# Altium PCB E-ink_brd.PcbDoc
Units mm, origin at the board's own origin, x right, y up, seen from the top; angles counter-clockwise.
Board outline 49.53 x 34.21 mm, 2 copper layers (Top Layer, Bottom Layer), stack 0.579 mm thick; 68 components, 58 nets, 239 pads, 102 vias.
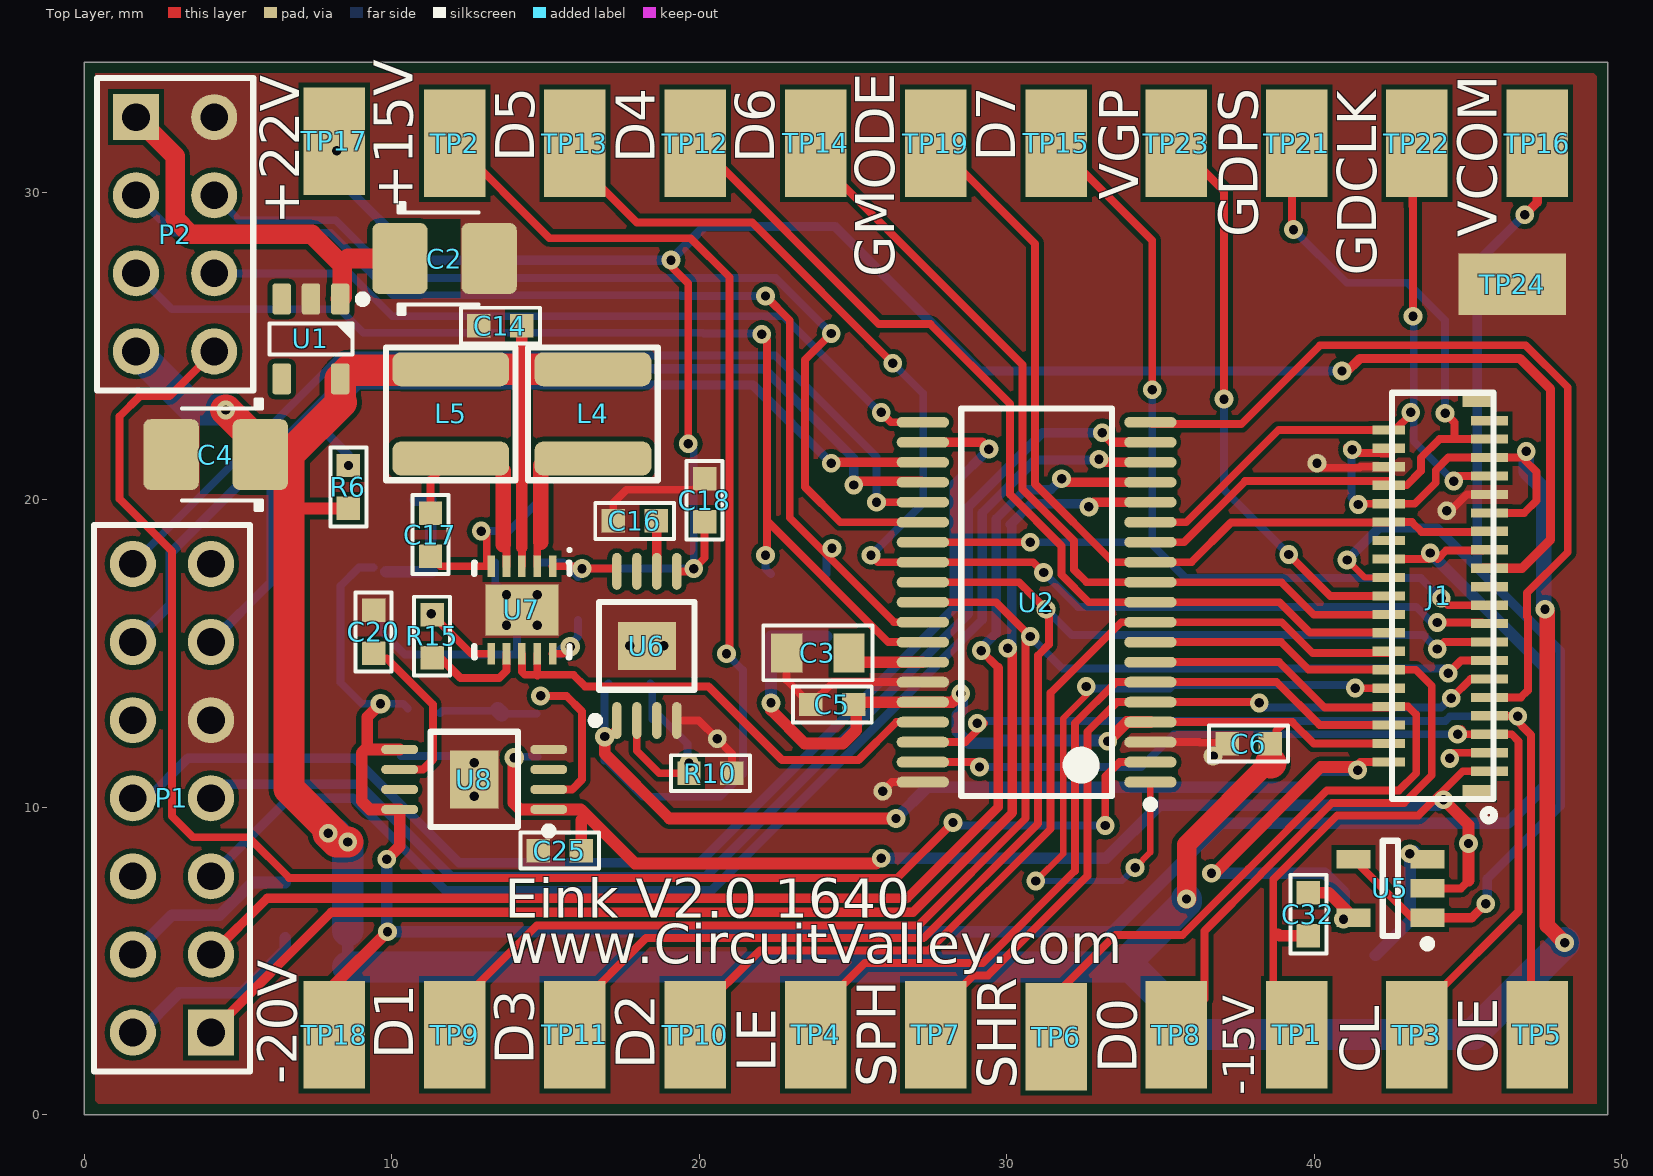
[diagram p0: Top Layer view]
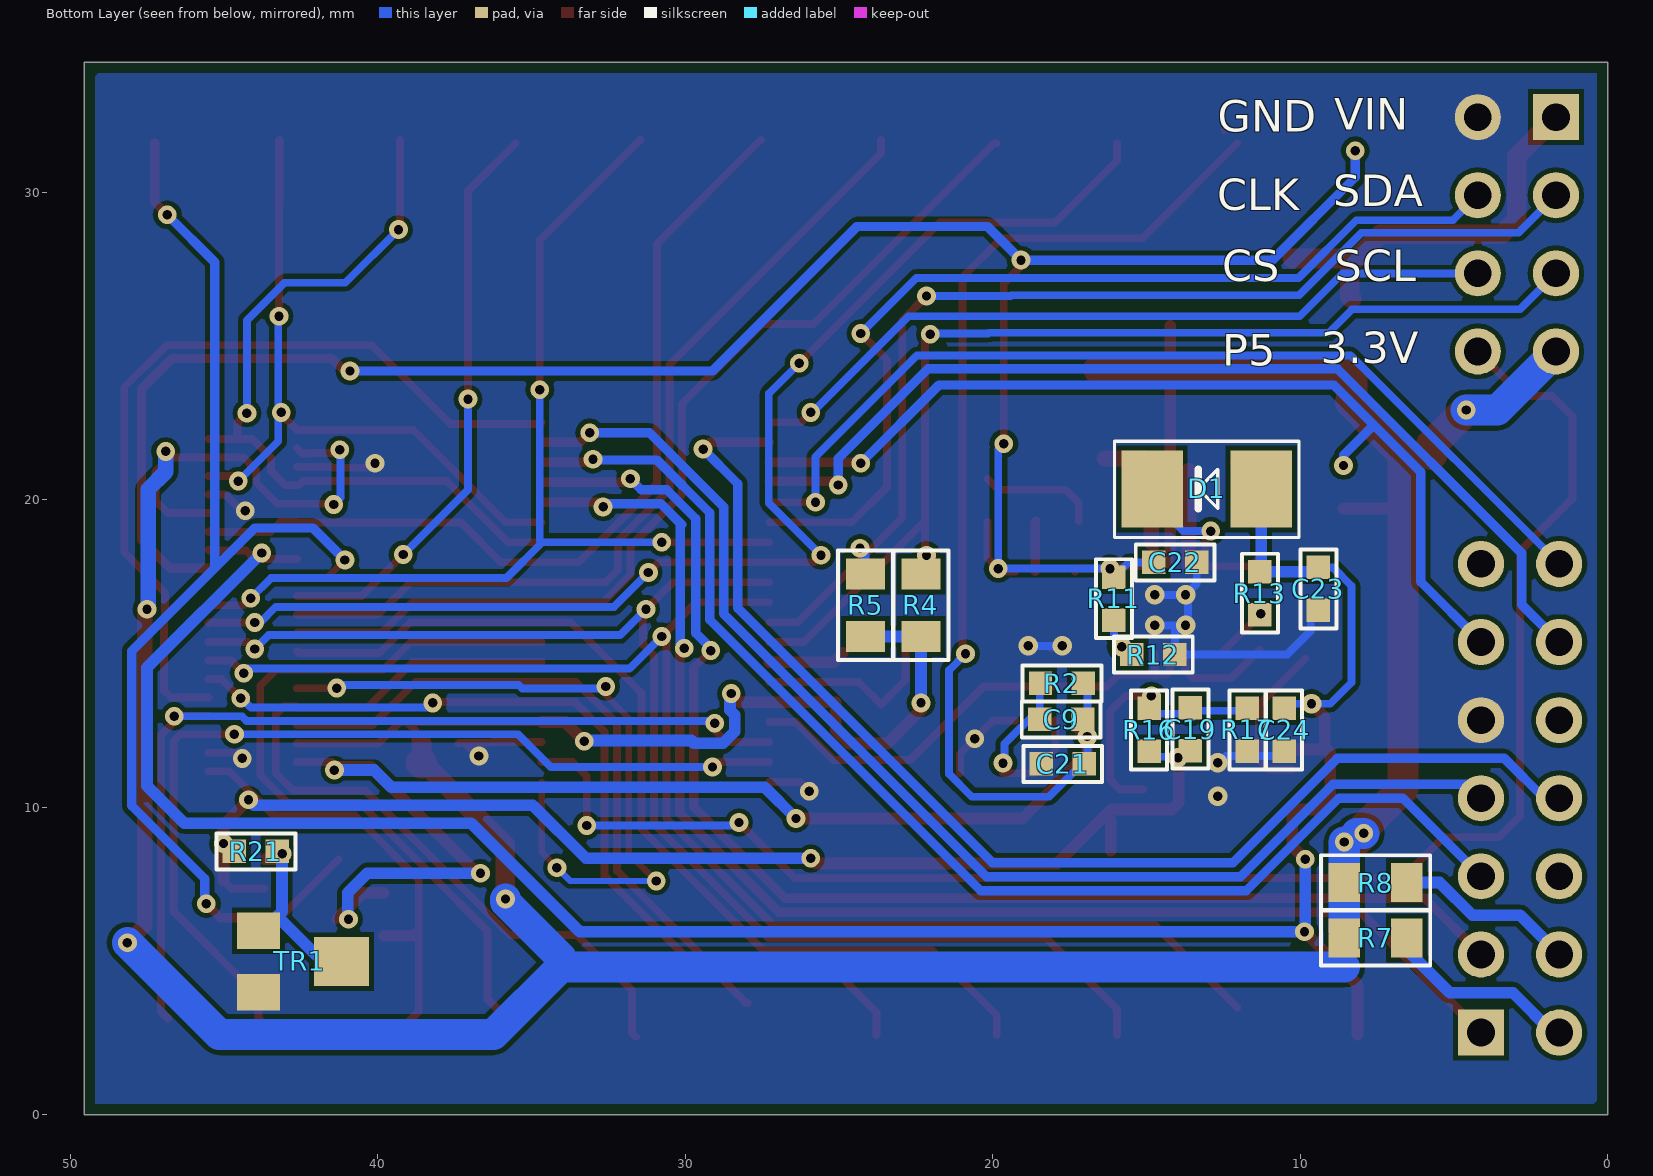
[diagram p1: Bottom Layer view, seen from below]

## Layer stack, top to bottom
Top Solder: solder mask 0.0102, Solder Resist, Dk 3.5
Top Layer: signal copper 0.0356
Dielectric1: core 0.508, FR-4, Dk 4.8
Bottom Layer: signal copper 0.0356
Bottom Solder: solder mask 0.0102, Solder Resist, Dk 3.5

## Board outline
0,0 0,34.214 49.53,34.214 49.53,0

## Design rules (kind name [scope] priority, off if disabled: settings)
Clearance [All] p1: gap=0.152
ComponentClearance [All] p1: gap=0 collisioncheckmode=3 verticalgap=0 showdistances=FALSE
HoleSize [All] p1: absolutevalues=TRUE maxlimit=12.7 minlimit=0.305 maxpercent=80.000 minpercent=20.000
MinimumAnnularRing [All] p1: minimumring=0.152
MinimumSolderMaskSliver [All] p1: minsoldermaskwidth=0
PlaneConnect [All] p1: planeconnectstyle=Relief reliefexpansion=0.203 reliefentries=4 reliefconductorwidth=0.203 reliefairgap=0
PolygonConnect [All] p1: connectstyle=Direct reliefconductorwidth=0 reliefentries=4 polygonreliefangle="90 Angle" airgapwidth=0
RoutingVias [All] p1: holewidth=0.457 width=0.61 viastyle="Through Hole" minholewidth=0.203 minwidth=0.33 maxholewidth=5.08 maxwidth=5.08
SilkToSilkClearance [All] p1: silktosilkclearance=0
SilkToSolderMaskClearance [IsPad] p1: minsilkscreentomaskgap=0 clearancetoexposedcopper=TRUE
SolderMaskExpansion [All] p1: expansion=0.091
Width [All] p1: maxlimit=12.7 minlimit=0.152 preferedwidth=0.254
24 further rules are at their usual default settings.

## Components (designator, comment, footprint, x,y, rotation, side; value= is the part's Value field where it differs from the comment)
C2 "10µ" CAPMP3528X210N 11.709,27.838 r0 top
C3 "2u2" 0805C-GENERIC 23.089,15.011 r0 top
C4 "10uf" CAPMP3528X210N 4.267,21.463 r180 top
C5 "100nF" 0603C-GENERIC 25.019,13.335 r180 top
C6 "100nF" 0603C-GENERIC 38.557,12.065 r180 top
C9 "10nf" 0603C-GENERIC 17.069,12.852 r0 bottom
C14 "10uF" 0603C-GENERIC 12.827,25.654 r0 top
C16 "1uF" 0603C-GENERIC 17.196,19.304 r0 top
C17 "1uF" 0603C-GENERIC 11.252,18.161 r90 top
C18 "22uF" 0603C-GENERIC 20.168,20.676 r270 top
C19 "10nf" 0603C-GENERIC 13.564,11.836 r90 bottom
C20 "1uF" 0603C-GENERIC 9.404,14.999 r90 top
C21 "22uF" 0603C-GENERIC 18.415,11.405 r180 bottom
C22 "22uF" 0603C-GENERIC 13.36,17.958 r0 bottom
C23 "22uF" 0603C-GENERIC 9.404,16.396 r90 bottom
C24 "22uF" 0603C-GENERIC 10.516,11.811 r90 bottom
C25 "22uF" 0603C-GENERIC 14.757,8.585 r0 top
C32 "100nf" 0603C-GENERIC 39.802,5.817 r90 top
D1 "SS4822" DIODE-SMA 10.389,20.345 r180 bottom
J1 "FH26-39S-0.3SHW" FH26-39S-0.3SHW 44.018,16.866 r90 top
L4 "10uh" IFSC-1515AH-01 16.535,22.784 r270 top
L5 "10uh" IFSC-1515AH-01 11.913,22.784 r270 top
P1 "Header 7X2A ISP" HDR2X7_CEN 4.115,2.667 r90 top
P2 "Header 4X2" HDR2X4 1.676,32.436 r270 top
R2 "390K" 0603R-2K2 18.44,14.021 r180 bottom
R4 "3.9K" 0805R-2K2 22.327,17.323 r270 bottom
R5 "3.9K" 0805R-2K2 24.13,17.323 r270 bottom
R6 "10K" 0603R-10K 8.585,19.71 r90 top
R7 "0R" 0805R-2K2 8.306,5.74 r180 bottom
R8 "0R" 0805R-2K2 8.306,7.544 r180 bottom
R10 "33K" 0603R-2K2 19.66,11.1 r0 top
R11 "300K" 0603R-2K2 16.053,16.078 r90 bottom
R12 "18K" 0603R-2K2 14.072,14.961 r0 bottom
R13 "390K" 0603R-2K2 11.303,16.256 r90 bottom
R15 "24K" 0603R-2K2 11.303,14.859 r90 top
R16 "390K" 0603R-2K2 14.91,13.208 r270 bottom
R17 "33K" 0603R-2K2 11.709,13.208 r270 bottom
R21 "unknown" 0603R-2K2 44.653,8.56 r180 bottom
TP1 "TEST_POINT" SMD_TEST_3.5_2.0#1 39.421,2.591 r90 top
TP2 "TEST_POINT" SMD_TEST_3.5_2.0#1 12.04,31.585 r90 top
TP3 "TEST_POINT" SMD_TEST_3.5_2.0#1 43.332,2.591 r90 top
TP4 "TEST_POINT" SMD_TEST_3.5_2.0#1 23.774,2.591 r270 top
TP5 "TEST_POINT" SMD_TEST_3.5_2.0#1 47.244,2.591 r90 top
TP6 "TEST_POINT" SMD_TEST_3.5_2.0#1 31.598,2.527 r90 top
TP7 "TEST_POINT" SMD_TEST_3.5_2.0#1 27.686,2.591 r90 top
TP8 "TEST_POINT" SMD_TEST_3.5_2.0#1 35.509,2.591 r90 top
TP9 "TEST_POINT" SMD_TEST_3.5_2.0#1 12.04,2.591 r90 top
TP10 "TEST_POINT" SMD_TEST_3.5_2.0#1 19.863,2.591 r90 top
TP11 "TEST_POINT" SMD_TEST_3.5_2.0#1 15.951,2.591 r90 top
TP12 "TEST_POINT" SMD_TEST_3.5_2.0#1 19.863,31.585 r90 top
TP13 "TEST_POINT" SMD_TEST_3.5_2.0#1 15.951,31.585 r90 top
TP14 "TEST_POINT" SMD_TEST_3.5_2.0#1 23.774,31.585 r90 top
TP15 "TEST_POINT" SMD_TEST_3.5_2.0#1 31.598,31.585 r90 top
TP16 "TEST_POINT" SMD_TEST_3.5_2.0#2 47.244,31.61 r90 top
TP17 "TEST_POINT" SMD_TEST_3.5_2.0#1 8.128,31.648 r90 top
TP18 "TEST_POINT" SMD_TEST_3.5_2.0#1 8.128,2.591 r90 top
TP19 "TEST_POINT" SMD_TEST_3.5_2.0#1 27.686,31.585 r90 top
TP21 "TEST_POINT" SMD_TEST_3.5_2.0#1 39.421,31.585 r90 top
TP22 "TEST_POINT" SMD_TEST_3.5_2.0#1 43.332,31.585 r90 top
TP23 "TEST_POINT" SMD_TEST_3.5_2.0#1 35.509,31.585 r90 top
TP24 "TEST_POINT" SMD_TEST_3.5_2.0#1 46.431,27 r180 top
TR1 "10k" SMDPOT 42.774,4.978 r270 bottom
U1 "TPS709" SOT23-5 7.366,25.222 r270 top
U2 "MSP430FR5739IDAR" TI-DA38_N 30.963,16.662 r180 top
U5 "OPA170AIDBVT" TI-DBV5_N 42.471,7.353 r180 top
U6 "TPS7A4901DGNR" TI-DGN8-1760X1425TP_N 18.288,15.24 r90 top
U7 "LT3463AEDD" LT-DD-10_V 14.224,16.408 r270 top
U8 "TPS7A3001DGNR" TI-DGN8-1760X1425TP_N 12.675,10.897 r180 top

## Footprints (in the part's own frame and the unit in brackets; to place one, negate y for a bottom-side part, rotate by r counter-clockwise, add the part's x,y. Pads: shape width x height; smd on the part's side, far side on the other; paste and mask are expansions set on the pad)
0603C-GENERIC [mil] "CAPACITOR 0603"
  rect 30x30 smd: 1(0,0) 2(55,0)
  silkscreen extent -23,-23 78,23, body extent -4,-15 59,15, height 19
0603R-2K2 [mil] "RESISTOR 0603"
  rect 30x30 smd: 1(0,0) 2(55,0)
  silkscreen extent -23,-23 78,23, body extent -4,-15 59,15, height 20
0603R-10K [mil] "RESISTOR 0603"
  rect 30x30 smd: 1(0,0) 2(55,0)
  silkscreen extent -23,-23 78,23, body extent -4,-15 59,15, height 20
0805C-GENERIC [mil] "CAPACITOR 0805"
  rect 40x50 smd: 1(-10,0) 2(70,0)
  silkscreen extent -40,-35 100,35, body extent -11,-25 70,25, height 26
0805R-2K2 [mil] "RESISTOR 0805"
  rect 40x50 smd: 1(-10,0) 2(70,0)
  silkscreen extent -40,-35 100,35, body extent -11,-25 70,25, height 27
CAPMP3528X210N [mm] "Molded body capacitor, Body 3.5x2.8mm, 1210, IPC Nominal settings"
  round 0.254 on Mech14: 0(0,0)
  rrect25% 1.8x2.3 smd: 1(-1.45,0) 2(1.45,0)
  Top Layer pour cut-out: -0.508,1.27 0.508,1.27 0.508,-1.27 -0.508,-1.27
  silkscreen extent -1.5,-1.8 1.1,1.8, body extent -1.75,-1.4 1.75,1.4, height 2.1
DIODE-SMA [mm]
  rect 2x2.5 smd: A(-0.875,0) K(-4.425,0)
  silkscreen extent -5.65,-1.58 0.35,1.55, body extent -5.2,-1.3 0,1.3, height 2.4
FH26-39S-0.3SHW [mm]
  rect 0.3x1.2 smd: 1(-5.7,-1.675) 3(-5.1,-1.675) 5(-4.5,-1.675) 7(-3.9,-1.675) 9(-3.3,-1.675) 11(-2.7,-1.675) 13(-2.1,-1.675) 15(-1.5,-1.675) 17(-0.9,-1.675) 19(-0.3,-1.675) 21(0.3,-1.675) 23(0.9,-1.675) 25(1.5,-1.675) 27(2.1,-1.675) 29(2.7,-1.675) 31(3.3,-1.675) 33(3.9,-1.675) 35(4.5,-1.675) 37(5.1,-1.675) 39(5.7,-1.675)
  rect 0.3x1.05 smd: 2(-5.4,1.6) 4(-4.8,1.6) 6(-4.2,1.6) 8(-3.6,1.6) 10(-3,1.6) 12(-2.4,1.6) 14(-1.8,1.6) 16(-1.2,1.6) 18(-0.6,1.6) 20(0,1.6) 22(0.6,1.6) 24(1.2,1.6) 26(1.8,1.6) 28(2.4,1.6) 30(3,1.6) 32(3.6,1.6) 34(4.2,1.6) 36(4.8,1.6) 38(5.4,1.6)
  rect 0.4x0.95 smd: 40(-6.35,-1.275) 41(6.35,-1.275)
  silkscreen extent -7.3,-1.82 6.6,1.5, body extent -6.6,-1.85 6.6,1.65, height 0.99
HDR2X4 [mm] "Connector; Header; 4x2 Position"
  rect 1.5x1.5 hole 0.9: 1(0,0)
  round 1.5 hole 0.9: 2(0,2.54) 3(2.54,0) 4(2.54,2.54) 5(5.08,0) 6(5.08,2.54) 7(7.62,0) 8(7.62,2.54)
  silkscreen extent -1.27,-1.27 8.89,3.81
HDR2X7_CEN [mm] "Connector; Header; 7x2 Position"
  rect 1.5x1.5 hole 0.9: 1(0,0)
  round 1.5 hole 0.9: 2(2.54,0) 3(5.08,0) 4(7.62,0) 5(10.16,0) 6(12.7,0) 7(15.24,0) 8(0,2.54) 9(2.54,2.54) 10(5.08,2.54) 11(7.62,2.54) 12(10.16,2.54) 13(12.7,2.54) 14(15.24,2.54)
  silkscreen extent -1.27,-1.27 16.51,3.81
IFSC-1515AH-01 [mm] "Vishay Dale Low Profile, High Current Inductors"
  rrect50% 1.1x3.8 smd: 1(-1.45,0) 2(1.45,0)
  silkscreen extent -2.16,-2.11 2.16,2.11, body extent -1.97,-1.95 1.98,2, height 1.65
LT-DD-10_V [mm] "SON, 10-Leads, Body 3x3mm, Pitch 0.5mm, Thermal Pad 2.38x1.65mm"
  rect 0.7x0.25 smd mask+0.102: 1(-1.425,1) 2(-1.425,0.5) 3(-1.425,0) 4(-1.425,-0.5) 5(-1.425,-1) 6(1.425,-1) 7(1.425,-0.5) 8(1.425,0) 9(1.425,0.5) 10(1.425,1)
  rect 1.65x2.38 smd mask+0.102: 11(0,0)
  silkscreen extent -2,-1.55 1.55,1.6, body extent -1.5,-1.5 1.5,1.5, height 0.8
SMD_TEST_3.5_2.0#1 [mm]
  rect 3.5x2 smd: 0(0,0)
  body extent -1.91,-1.02 1.9,1.01, height 2.3
SMD_TEST_3.5_2.0#2 [mm]
  rect 3.5x2 smd: 0(-0.025,0)
  body extent -1.91,-1.02 1.9,1.01, height 2.3
SMDPOT [mm]
  rect 1.2x1.4 smd: 1(-1,-1.1) 2(1,-1.1)
  rect 1.6x1.8 smd: W(0,1.6)
  body extent -1.8,-1.53 1.8,2.43, height 1.16
SOT23-5 [mm]
  round 0.5 on Mech14: 0(0,0)
  rrect25% 1x0.6 smd: 1(-1.3,0.95) 2(-1.3,0) 3(-1.3,-0.95) 4(1.3,-0.95) 5(1.3,0.95)
  silkscreen extent -1.42,-1.35 0.51,1.81, body extent -1.4,-1.45 1.4,1.45, height 1.44
TI-DA38_N [mm] "SOP, 38-Leads, Body 12.5x6.1mm, Pitch 0.65mm, IPC Medium Density"
  oval 1.7x0.35 smd: 1(-3.7,5.85) 2(-3.7,5.2) 3(-3.7,4.55) 4(-3.7,3.9) 5(-3.7,3.25) 6(-3.7,2.6) 7(-3.7,1.95) 8(-3.7,1.3) 9(-3.7,0.65) 10(-3.7,0) 11(-3.7,-0.65) 12(-3.7,-1.3) 13(-3.7,-1.95) 14(-3.7,-2.6) 15(-3.7,-3.25) 16(-3.7,-3.9) 17(-3.7,-4.55) 18(-3.7,-5.2) 19(-3.7,-5.85) 20(3.7,-5.85) 21(3.7,-5.2) 22(3.7,-4.55) 23(3.7,-3.9) 24(3.7,-3.25) 25(3.7,-2.6) 26(3.7,-1.95) 27(3.7,-1.3) 28(3.7,-0.65) 29(3.7,0) 30(3.7,0.65) 31(3.7,1.3) 32(3.7,1.95) 33(3.7,2.6) 34(3.7,3.25) 35(3.7,3.9) 36(3.7,4.55) 37(3.7,5.2) 38(3.7,5.85)
  silkscreen extent -3.83,-6.3 2.45,6.7, body extent -3.1,-6.3 3.1,6.3, height 1.2
TI-DBV5_N [mm] "SOT23, 5-Leads, Body 2.9x1.6mm, Pitch 0.95mm, IPC Medium Density"
  rect 1.1x0.6 smd: 1(-1.2,0.95) 2(-1.2,0) 3(-1.2,-0.95) 4(1.2,-0.95) 5(1.2,0.95)
  silkscreen extent -1.33,-1.55 0.25,1.92, body extent -0.87,-1.52 0.87,1.53, height 1.45
TI-DGN8-1760X1425TP_N [mm] "SOIC, 8-Leads, Body 3x3mm, Pitch 0.65mm, Thermal Pad 1.76x1.425mm, IPC Medium Density"
  oval 1.2x0.3 smd: 1(-2.425,0.975) 2(-2.425,0.325) 3(-2.425,-0.325) 4(-2.425,-0.975) 5(2.425,-0.975) 6(2.425,-0.325) 7(2.425,0.325) 8(2.425,0.975)
  rect 1.57x1.89 smd: 9(0,0)
  silkscreen extent -2.55,-1.55 1.43,1.8, body extent -1.55,-1.55 1.55,1.55, height 1.1

## Part data
C2 C4: library part CAPT_47u_1210_6V3, "Capacitor SMD Tantalum 47uF 20% 6.3V 1210"
C3: library part 0805C-2U2-6V3-X5R-PAN, "CAPACITOR 0805 CERAMIC"
C5 C6: library part 0603C-100NF-25V-X7R-TDK, "CAPACITOR 0603 CERAMIC"
C9 C14 C16 C17 C18 C19 C20 C21 C22 C23 C24 C25 C32: library part 0603C-10UF-6V3-X5R-MUR, "CAPACITOR 0603 CERAMIC"
D1: library part MBRS140, "DIODE"
L4 L5: library part inductor_smd
P1: library part "Header 7X2A", "Header, 7-Pin, Dual row"
P2: "Header, 4-Pin, Dual row"
R2 R10 R11 R12 R13 R15 R16 R17 R21: library part 0603R-2K2, "GENERIC RESISTOR 0603"
R4 R5 R7 R8: library part 0805R-2K2, "RESISTOR 0805 1/4 WATT THIN FILM"
R6: library part 0603R-10K, "GENERIC RESISTOR 0603"
TR1: library part R-TRIM-SMD-10k, "GENERIC SMD TRIMMER"
U2: "24 MHz Mixed Signal Microcontroller, 1024 B SRAM and 33 GPIOs, -40 to 85 degC, 38-pin SOP (DA), Green (RoHS & no Sb/Br)"
U5: library part OPA244NA/250, "MicroPower Single-Supply Operational Amplifier MicroAmplifier(TM) Series, 2.2 to 36 V, -40 to 85 degC, 5-pin SOT23 (DBV5), Green (RoHS & no Sb/Br)"
U6: "Single Output High PSRR LDO, 150 mA, Adjustable 1.2 to 33 V Output, 3 to 36 V Input, with Ultra-Low Noise, 8-pin MSOP (DGN), -40 to 125 degC, Green (RoHS & no Sb/Br)"
U7: "Dual Micropower DC/DC Converters with Schottky Diodes, 2.4 to 15 V Vin, 10-pin SON (DD-10), -40 to 85 degC"
U8: "Single Output High PSRR LDO, 200 mA, Adjustable -1.18 to -33 V Output, -3 to -36 V Input, with Ultra-Low Noise, 8-pin MSOP (DGN), -40 to 125 degC, Green (RoHS & no Sb/Br)"

## Via types
v1: diameter 0.61, hole 0.305, Top Layer to Bottom Layer, tented both sides, 88 vias
v2: diameter 0.635, hole 0.305, Top Layer to Bottom Layer, 8 vias
v3: diameter 0.635, hole 0.305, Top Layer to Bottom Layer, tented both sides, 5 vias
v4: diameter 0.61, hole 0.305, Top Layer to Bottom Layer, 1 vias

## Nets (pads, with @x,y where several pads share a name; then routed paths per layer and width w, separated by ;. In a path a pad name is that pad's centre, name@x,y a point inside that pad or via, vN(x,y) a via of type N, cw(c..) or ccw(c..) an arc to the next point about the centre after c; other vN are vias at no path point)
3.3V: C4.1 C5.1 C6.1 C14.2 J1.4 J1.29 J1.30 J1.35 J1.36 L4.1 L5.1 P2.7 R4.2 R5.2 R6.1 R7.1 R8.1 U1.5 U2.4 U2.34 U7.3 | length 155
  Top Layer w0.254: U7.3 14.224,18.44 ; U2.4 39.04,12.762 ; C6.1@38.76,12.065 38.76,12.483 39.04,12.762 ; v1@41.046,21.692 41.224,21.692 41.402,21.514 42.159,21.514 42.177,21.495 42.448,21.495 J1.36@42.618,21.666 ; v1(41.427,19.837) 41.427,19.866 42.618,19.866 42.621,19.863 43.256,19.863 43.942,20.549 43.942,20.955 44.353,21.366 J1.35 46.689,21.366 v1(46.888,21.565) ; J1.4@42.593,12.09 42.618,12.066 39.979,12.066 39.282,12.762 39.04,12.762 ; J1.29@45.493,19.566 46.82,19.566 47.219,19.964 47.219,20.904 v1@46.825,21.298
  Top Layer w0.381: 6.655,19.736 6.68,19.71 R6.1 ; 14.224,18.44 14.224,24.234 C14.2 ; v1(22.327,13.386) 22.327,13.157 23.419,12.065 24.663,12.065 25.095,12.497 25.095,13.411 25.096,13.412 U2.34 28.221,13.412 v1(28.499,13.691) ; v1(33.274,12.141) 33.895,12.762 U2.4
  Top Layer w0.508: v1(47.498,16.434) 47.574,16.358 47.574,6.147 v1(48.133,5.588)
  Top Layer w0.635: v1(35.839,7.01) 35.839,8.774 38.557,11.491 C6.1
  Top Layer w1.016: v1(4.597,22.911) 5.717,21.791 C4.1 ; v4(7.925,9.144) 8.204,8.865 v1(8.56,8.865) ; v1@8.331,8.915 6.655,10.592 6.655,19.736 6.655,21.463 8.357,23.165 8.316,23.205 U1.5 8.6,24.206 11.885,24.206 L5.1 14.224,24.234 L4.1 ; 38.571,11.43 38.583,11.43
  Bottom Layer w0.254: v1(41.224,21.615) 41.199,21.59 41.199,20.066 v1(41.427,19.837)
  Bottom Layer w0.381: 8.56,4.801 R7.1 ; v1(22.327,13.386) R4.2 R5.2 ; v1(28.499,13.691) 28.537,13.729 28.537,13.146 28.384,12.994 28.384,12.457 28.764,12.078 29.709,12.078 29.798,12.167 33.249,12.167 v1(33.274,12.141)
  Bottom Layer w0.508: v1(46.888,21.565) 46.888,20.904 47.461,20.331 47.461,16.47 v1(47.498,16.434)
  Bottom Layer w1.016: P2.7 3.581,22.911 v1(4.597,22.911) ; v4(7.925,9.144) v4@8.153,9.144 ; 8.56,4.801 34.036,4.801 ; R7.1@8.56,5.969 R8.1 v1(8.56,8.865) ; v1(35.839,7.01) 35.839,6.909 34.036,5.105 34.036,4.801 ; v1(48.133,5.588) 45.146,2.601 36.235,2.601 34.036,4.801
5V: J1.20 TP23.0 | length 18.9
  Top Layer w0.254: TP23.0 37.059,30.035 v1(37.059,23.266) ; v1(39.167,18.212) 40.513,16.866 J1.20@42.618,16.866
  Bottom Layer w0.254: v1(37.059,23.266) 37.059,20.32 v1(39.167,18.212)
+15V: C9.1 C21.2 C32.2 J1.2 R2.2 TP2.0 U5.5 U6.1 | length 77.3
  Top Layer w0.254: TP2.0 15.126,28.499 19.71,28.499 20.98,27.229 20.98,15.088 v1(20.879,14.986) ; TP2.0@12.421,32.055 TP2.0@12.465,32.01 ; v3(16.916,12.294) 17.043,12.294 17.313,12.563 U6.1 ; U5.5 U5.5@41.363,6.312 ; v1@41.326,11.303 41.488,11.466 J1.2@42.618,11.466
  Top Layer w0.381: v3(16.916,12.294) 16.916,11.735 19.025,9.627 v1(26.391,9.627) ; v1(36.652,7.849) 36.754,7.849 40.208,11.303 v1@41.326,11.303 ; C32.2 40.461,7.214 U5.5
  Bottom Layer w0.254: R2.2 16.916,13.894 v3(16.916,12.294) 16.916,11.506 16.993,11.506 18.161,10.338 20.676,10.338 21.412,11.074 21.412,14.453 v1(20.879,14.986)
  Bottom Layer w0.381: v1(26.391,9.627) 27.407,10.643 39.548,10.643 40.107,11.201 v1(41.402,11.201) ; v1(36.652,7.849) 40.335,7.849 40.97,7.214 40.97,6.375 v1(40.945,6.35)
+22V: C18.2 C22.2 J1.23 R11.2 TP17.0 U6.5 U6.8 U7.1 | length 71.8
  Top Layer w0.254: U7.1 16.101,17.833 v1(16.18,17.755) 17.223,17.755 U6.8 ; v1@18.974,27.686 19.634,27.026 v1(19.634,21.819) ; U6.5 19.722,17.665 v1(19.812,17.755) 20.168,18.11 C18.2
  Top Layer w0.305: v1(40.894,24.181) 40.919,24.181 40.996,24.105 41.478,24.587 46.685,24.587 47.676,23.597 47.676,18.694 46.747,17.766 J1.23@45.493,17.766
  Bottom Layer w0.254: C22.2 15.57,17.958 R11.2 ; v1(16.18,17.755) v1(19.812,17.755) 19.812,21.641 v1(19.634,21.819)
  Bottom Layer w0.305: v1(8.204,31.344) 8.204,30.48 10.897,27.788 v1(19.075,27.788) 20.168,28.88 24.409,28.88 29.108,24.181 v1(40.894,24.181)
-15V: C19.1 C25.2 C32.1 J1.1 R16.2 R21.1 TP1.0 U5.2 U8.1 | length 54.3
  Top Layer w0.254: TP1.0 38.659,3.353 38.659,7.645 40.742,9.728 43.383,9.728 44.821,11.166 J1.1@45.493,11.166 ; U5.2 44.761,7.353 45.018,7.61
  Top Layer w0.381: v3(13.97,11.608) 13.945,11.582 13.945,10.135 14.158,9.922 U8.1 16.143,9.922 16.322,9.743 ; C25.2 16.154,9.576 16.322,9.743 ; v1(25.908,8.331) 25.743,8.166 17.899,8.166 16.322,9.743 ; 38.811,5.867 38.862,5.817 C32.1 ; v1(44.196,10.236) 45.009,9.423 v1(45.009,8.814) 45.009,7.62 45.018,7.61
  Bottom Layer w0.254: v3@14.148,11.635 R16.2@14.732,11.635
  Bottom Layer w0.381: v1(25.908,8.331) 33.221,8.331 34.949,10.058 44.018,10.058 v1(44.196,10.236)
-20V: C23.2 C24.2 D1.A J1.24 J1.25 R13.2 TP18.0 U8.5 U8.8 | length 77
  Top Layer w0.254: J1.24@42.618,18.066 43.713,18.066 43.713,18.212 v1(43.764,18.263) ; 43.999,18.066 44.272,18.339 45.466,18.339 J1.25@45.493,18.366
  Top Layer w0.381: TP18.0 8.128,4.216 v1(9.855,5.944) ; v3(9.627,13.36) 9.195,12.929 9.195,11.938 ; v1(9.83,8.306) 10.25,8.726 U8.8 9.281,9.922 9.017,10.185 9.017,11.76 9.195,11.938 ; U8.5 9.261,11.872 9.195,11.938
  Bottom Layer w0.254: C23.2 8.928,17.793 8.331,17.196 8.331,14.046 9.017,13.36 v3(9.627,13.36) 10.363,13.36 C24.2
  Bottom Layer w0.381: 9.804,17.653 R13.2 11.264,17.692 D1.A@11.264,19.99 ; v1(9.83,8.306) 9.83,5.969 v1(9.855,5.944) 33.426,5.944 36.957,9.474 46.279,9.474 47.498,10.693 47.498,14.529 v1(43.764,18.263) ; D1.A@10.762,19.982 D1.A@11.179,19.982
CLK: P2.4 U2.25 | length 31.6
  Top Layer w0.254: v1(24.282,25.4) 23.431,24.549 23.431,20.409 24.578,19.262 U2.25
  Bottom Layer w0.254: P2.4 5.029,29.083 8.169,29.083 10.049,27.203 22.479,27.203 v1(24.282,25.4)
CS: P2.6 U2.20 | length 25.1
  Top Layer w0.254: v1(25.908,22.835) 26.23,22.512 U2.20
  Bottom Layer w0.254: P2.6 8.611,27.356 10.008,25.959 22.733,25.959 25.781,22.911 25.832,22.911 v1(25.908,22.835)
CTS: P1.12
EI_CE1: J1.10 U2.1 | length 23.6
  Top Layer w0.203: v1(30.937,7.595) 31.826,8.484 31.826,12.883 32.575,13.632 v1(32.575,13.919) ; v1(34.166,8.027) 34.663,8.524 U2.1
  Top Layer w0.254: v1(41.326,13.868) 41.329,13.866 J1.10@42.618,13.866
  Bottom Layer w0.203: v1(30.937,7.595) 33.733,7.595 v1(34.166,8.027)
  Bottom Layer w0.254: v1(32.575,13.919) 32.638,13.856 35.293,13.856 35.408,13.97 41.224,13.97 v1(41.326,13.868)
EI_CE2: J1.9 U2.19 | length 27.2
  Top Layer w0.254: U2.19 34.721,22.454 37.617,22.454 40.183,25.019 46.864,25.019 48.235,23.648 48.235,18.288 46.914,16.967 46.914,16.192 46.939,16.166 46.939,13.792 46.713,13.566 J1.9 J1.9@45.493,13.566
EI_CL: J1.5 TP3.0 U2.37 | length 31.4
  Top Layer w0.254: U2.37 29.203,11.462 29.108,11.368 v1(29.108,11.303) ; TP3.0 43.866,3.124 43.866,3.835 46.634,6.604 46.634,12.141 46.41,12.366 J1.5 44.674,12.366 44.704,12.395 44.653,12.395 v1@44.78,12.522 ; v1(44.653,12.37) v1@44.679,12.37
  Bottom Layer w0.254: v1(29.108,11.303) 34.366,11.303 35.433,12.37 v1(44.653,12.37)
EI_D0: J1.12 TP8.0 U2.8 | length 25.7
  Top Layer w0.254: U2.8 38.917,15.362 39.802,14.478 42.606,14.478 42.618,14.466 43.294,14.466 43.815,13.945 43.815,11.033 42.917,10.135 40.573,10.135 38.252,7.814 38.252,7.798 36.424,5.969 36.424,3.759 TP8.0@35.509,2.845
EI_D1: J1.13 TP9.0 U2.29 | length 46.6
  Top Layer w0.254: TP9.0@12.04,3.48 14.707,6.147 27.121,6.147 30.607,9.633 30.607,15.392 v1(30.759,15.545) 29.642,16.662 U2.29 ; v1@44.196,14.351 v1(44.348,14.351) 44.763,14.766 J1.13@45.493,14.766
  Bottom Layer w0.254: v1(30.759,15.545) 31.801,14.503 44.196,14.503 v1(44.348,14.351)
EI_D2: J1.14 TP10.0 U2.9 | length 31.7
  Top Layer w0.254: TP10.0 19.863,3.226 21.971,5.334 27.457,5.334 31.42,9.296 31.42,13.716 33.716,16.012 U2.9 38.937,16.012 39.943,15.007 42.559,15.007 J1.14@42.618,15.066
EI_D3: J1.15 TP11.0 U2.28 | length 44.8
  Top Layer w0.254: TP11.0 15.951,3.429 18.263,5.74 27.289,5.74 31.013,9.465 31.013,14.935 31.369,15.291 31.369,16.332 v1(31.267,16.434) 30.389,17.312 U2.28 ; v1(43.993,15.138) 44.22,15.366 J1.15@45.493,15.366
  Bottom Layer w0.254: v1(31.267,16.434) 32.106,15.596 43.536,15.596 v1(43.993,15.138)
EI_D4: J1.16 TP12.0 U2.10 | length 31.6
  Top Layer w0.254: TP12.0 19.952,31.585 25.832,25.705 27.508,25.705 30.099,23.114 30.099,20.168 31.775,18.491 31.775,17.551 32.664,16.662 U2.10 38.862,16.662 39.853,15.672 42.612,15.672 J1.16@42.618,15.666
EI_D5: J1.17 TP13.0 U2.27 | length 41.8
  Top Layer w0.254: TP13.0 15.951,31.013 17.958,29.007 21.717,29.007 v1(26.289,24.435) ; v1(25.578,18.186) 25.802,17.962 U2.27 30.856,17.962 v1(31.191,17.628) ; v1(43.993,16.002) 45.457,16.002 J1.17@45.493,15.966
  Bottom Layer w0.254: v1(25.578,18.186) 27.28,19.888 27.28,23.444 v1(26.289,24.435) ; v1(31.191,17.628) 32.309,16.51 43.307,16.51 43.815,16.002 v1(43.993,16.002)
EI_D6: J1.18 TP14.0 U2.11 | length 28.6
  Top Layer w0.254: TP14.0@23.622,31.699 23.622,31.267 30.505,24.384 30.505,20.336 32.182,18.66 32.182,17.72 32.589,17.312 U2.11 38.923,17.312 39.98,16.256 42.609,16.256 J1.18@42.618,16.266
EI_D7: J1.19 TP15.0 U2.26 | length 33.7
  Top Layer w0.254: U2.26 v1(30.759,18.612) ; TP15.0@31.445,31.699 34.722,28.423 v1(34.722,23.571) ; v1(44.12,16.789) 44.344,16.566 J1.19@45.493,16.566
  Bottom Layer w0.254: v1(30.759,18.612) 34.646,18.612 ; v1(34.722,23.571) 34.722,18.689 34.646,18.612 ; v1@44.018,16.688 v1(44.12,16.789) 43.459,17.45 35.808,17.45 34.646,18.612
EI_GDCLK: J1.33 J1.38 TP22.0 U2.14 | length 25
  Top Layer w0.254: U2.14 35.833,19.262 38.836,22.266 42.618,22.266 43.129,22.777 v1(43.129,22.835) ; 43.18,29.54 43.18,31.699 43.205,31.674 v1(43.205,25.959) ; v1(44.526,20.599) 44.526,20.703 44.464,20.766 J1.33@45.493,20.766
  Bottom Layer w0.254: v1(43.205,25.959) 43.231,25.933 43.231,21.895 v1(44.526,20.599)
EI_GDPS: J1.32 J1.37 TP21.0 U2.13 | length 25.6
  Top Layer w0.254: U2.13 35.757,18.612 37.744,20.599 42.432,20.599 J1.32@42.534,20.498 ; TP21.0@39.268,31.699 39.268,28.829 v1(39.319,28.778) ; J1.32@42.618,20.466 42.995,20.466 43.459,20.93 43.459,21.361 44.069,21.971 ; 44.074,21.966 44.552,21.966 ; v1(44.247,22.809) 44.552,22.504 44.552,21.966 ; J1.37@45.493,21.966 44.552,21.966
  Bottom Layer w0.254: v1(39.319,28.778) 41.046,27.051 43.028,27.051 44.247,25.832 v1(44.247,22.809)
EI_GMODE: J1.27 J1.28 TP19.0 U2.12 | length 28.9
  Top Layer w0.254: TP19.0@27.534,31.699 30.912,28.321 30.912,20.504 33.454,17.962 U2.12 35.996,17.962 37.287,19.253 42.606,19.253 42.618,19.266 43.168,19.266 43.485,18.948 45.476,18.948 J1.27@45.493,18.966
EI_LE: J1.6 TP4.0 U2.6 | length 27.4
  Top Layer w0.254: TP4.0 23.774,3.327 25.375,4.928 29.21,4.928 32.207,7.925 32.207,12.725 33.544,14.062 U2.6 38.77,14.062 40.166,12.666 J1.6@42.618,12.666
EI_OE: J1.7 TP5.0 U2.36 | length 32.4
  Top Layer w0.254: U2.36 28.648,12.112 29.261,12.725 v1(29.032,12.725) ; v1(46.609,12.954) 45.505,12.954 45.493,12.966 46.42,12.966 47.041,12.344 47.041,3.353 TP5.0@46.812,3.124
  Bottom Layer w0.254: v1(29.032,12.725) 29.108,12.802 44.259,12.802 44.411,12.954 v1(46.609,12.954)
EI_SHR: J1.8 TP6.0 U2.7 | length 27.4
  Top Layer w0.254: TP6.0 31.725,2.654 31.725,4.039 33.528,5.842 35.712,5.842 37.846,7.976 37.846,7.982 40.405,10.541 42.748,10.541 43.307,11.1 43.307,13.005 43.046,13.266 42.618,13.266 42.586,13.233 40.335,13.233 38.856,14.712 U2.7
EI_SPH: J1.11 TP7.0 U2.5 | length 24.8
  Top Layer w0.254: TP7.0@27.965,3.632 28.016,3.632 28.905,4.521 29.378,4.521 32.614,7.756 32.614,12.446 33.58,13.412 U2.5 38.175,13.412 v1(38.202,13.386) ; v1(44.45,13.538) 45.077,14.166 J1.11@45.493,14.166
  Bottom Layer w0.254: v1(38.202,13.386) 38.354,13.233 44.116,13.233 44.421,13.538 v1(44.45,13.538)
GND: C2.2 C3.1 C4.2 C5.2 C6.2 C14.1 C16.1 C18.1 C20.2 C21.1 C22.1 C23.1 C24.1 C25.1 J1.3 J1.31 J1.34 P1.5 P2.2 R10.2 R12.1 R17.2 TP24.0 TR1.2 U1.2 U2.3 U2.33 U2.38 U6.4 U6.9 U7.11 U8.4 U8.9 | length 37
  Top Layer w0.254: C16.1 17.196,19.888 17.628,20.32 19.812,20.32 C18.1 ; U6.9@18.004,15.242 U6.9@18.096,15.15 ; U6.4 19.976,12.815 v1(20.574,12.217) 21.057,11.735 R10.2 ; C3.1 22.835,14.122 C5.2 24.349,14.062 U2.33 ; v1(25.959,10.516) 26.256,10.812 U2.38 ; U2.3 36.249,12.112 36.271,12.09 37.338,12.09 C6.2@37.363,12.065 ; v1(36.703,11.659) 36.754,11.659 C6.2 ; v1(40.081,21.184) 40.234,21.031 41.466,21.031 41.501,21.066 J1.34@42.618,21.066 ; v1(44.298,19.634) 44.425,19.634 44.956,20.166 J1.31@45.493,20.166 ; v1(44.399,11.582) 44.399,11.735 44.43,11.766 J1.3@45.493,11.766
  Bottom Layer w0.254: C23.1@9.652,16.256 9.652,15.723 10.414,14.961 R12.1@14.064,14.961 ; C24.1@10.291,11.66 12.404,11.66 v2@12.665,11.4 ; C22.1 13.36,17.272 v2(13.724,16.908) ; R12.1 R12.1@14.064,14.961 ; v2@14.64,15.9 14.064,15.9 ; v2@14.64,16.9 13.64,16.9 13.64,15.9 14.064,15.9 ; v2@17.636,15.24 v2(17.738,15.24) v2(18.838,15.24) ; R12.1@14.064,14.961 14.064,15.9
  other v2: 12.675,10.347 12.675,11.447 13.724,15.908 14.724,15.908 14.724,16.908
GVCC: J1.26
NetC3_2: C3.2 U2.32 | length 2.5
  Top Layer w0.381: C3.2 25.166,14.712 U2.32
NetC9_2: C9.2 R2.1 R10.1 U6.2 | length 6.8
  Top Layer w0.254: U6.2 17.963,11.831 18.694,11.1 R10.1 v1(19.66,11.43)
  Bottom Layer w0.254: R2.1@18.397,14.021 18.466,13.952 C9.2@18.466,13.201 ; C9.2 C9.2@18.466,13.201 ; v1@19.609,11.379 19.609,12.058 C9.2@18.466,13.201
NetC16_2: C16.2 U6.6 | length 1.6
  Top Layer w0.305: C16.2 18.613,19.284 U6.6
NetC17_1: C17.1 D1.K U7.5 | length 5.8
  Top Layer w0.254: C17.1 11.58,17.833 13.081,17.833 ; v1(12.903,18.974) 12.954,18.974 13.03,19.05 13.081,18.999 13.081,17.833 ; U7.5 13.081,17.833
  Bottom Layer w0.254: v1(12.903,18.974) 13.798,18.974 D1.K@14.814,19.99
NetC19_2: C19.2 R16.1 R17.1 U8.2 | length 8.4
  Top Layer w0.254: v1(14.834,13.614) 15.672,13.614 16.18,13.106 16.18,10.893 15.858,10.572 U8.2
  Bottom Layer w0.254: R17.1@11.561,13.057 11.635,13.132 13.468,13.132 13.568,13.032 R16.1@14.711,13.032
  Bottom Layer w0.508: C19.2@13.444,13.156 C19.2@13.568,13.032
NetC20_1: C20.1 U8.6 | length 5.1
  Top Layer w0.254: 9.83,14.834 11.332,13.331 11.332,11.546 11.008,11.222 U8.6
NetP1_8: P1.8 R7.2 | length 6.4
  Bottom Layer w0.381: P1.8 1.778,2.667 3.073,3.962 5.131,3.962 6.528,5.359 R7.2
NetP1_9: P1.9 R8.2 | length 5.9
  Bottom Layer w0.381: P1.9 2.845,6.477 4.39,6.477 5.457,7.544 R8.2
NetR11_1: R11.1 R12.2 U7.10 | length 2.3
  Top Layer w0.254: U7.10 15.568,14.983 v3(15.799,15.215)
  Bottom Layer w0.254: R12.2@15.461,15.113 R12.2@15.63,15.282 ; R12.2 16.053,15.545 R11.1
NetR13_1: R13.1 R15.2 U7.6 | length 2.5
  Top Layer w0.254: R15.2 12.576,14.983 U7.6
  Bottom Layer w0.254: R13.1@11.244,16.223 R13.1@11.244,16.281
  other v3: 11.278,16.281
NetR15_1: R15.1 U7.7 | length 3.4
  Top Layer w0.254: R15.1@11.32,15.105 12.227,14.199 13.487,14.199 13.724,14.435 U7.7
NetR21_2: R21.2 TR1.1 TR1.W U5.3 | length 4.7
  Top Layer w0.381: v1(43.104,8.484) 43.284,8.303 U5.3
  Bottom Layer w0.381: TR1.W@41.986,5.182 43.256,6.452 43.104,6.604 v1(43.104,8.484) 43.18,8.484 R21.2
P5: P2.8 U2.2 | length 52.9
  Top Layer w0.254: P2.8 2.769,23.368 1.803,23.368 1.143,22.708 1.143,20.015 2.845,18.313 2.845,9.703 3.531,9.017 5.334,9.017 6.655,7.696 26.441,7.696 v1(28.245,9.5) ; v1(33.198,9.398) 33.198,10.998 33.662,11.462 U2.2
  Bottom Layer w0.254: v1(28.245,9.5) 28.219,9.5 28.321,9.398 v1(33.198,9.398)
R\S\T\: P1.6 R6.2 U2.22 | length 31.5
  Top Layer w0.305: v1(24.282,21.184) 24.311,21.212 U2.22
  Bottom Layer w0.305: P1.6 6.076,17.329 6.076,20.898 7.6,22.422 ; v1(8.585,21.107) 8.585,21.438 7.6,22.422 ; v1(24.282,21.184) 21.742,23.724 21.539,23.724 8.902,23.724 7.6,22.422
RTS: P1.7
RX: P1.14 U2.24 | length 31.3
  Top Layer w0.254: v1(25.756,19.912) U2.24
  Bottom Layer w0.254: P1.14 8.357,24.689 22.454,24.689 25.756,21.387 v1(25.756,19.912)
SCL: P2.5 R4.1 U2.31 | length 35.8
  Top Layer w0.254: v1(22.022,25.375) 22.2,25.197 22.2,19.304 ; v1(22.149,18.186) 22.2,18.237 22.2,19.304 ; U2.31 26.141,15.362 22.2,19.304
  Bottom Layer w0.254: P2.5 2.845,26.187 8.306,26.187 9.068,25.425 20.117,25.425 20.142,25.4 21.996,25.4 v1(22.022,25.375) ; v1(22.149,18.186) 22.149,17.755 R4.1
SDA: P2.3 R5.1 U2.30 | length 36
  Top Layer w0.254: v1(22.149,26.619) 22.936,25.832 22.936,19.406 26.329,16.012 U2.30
  Bottom Layer w0.254: P2.3 2.896,28.677 8.001,28.677 10.033,26.645 19.38,26.645 19.406,26.619 v1(22.149,26.619) ; R5.1 24.13,18.237 v1(24.308,18.415)
SHDN: U2.35 U7.8 U7.9 | length 16
  Top Layer w0.254: U7.8 14.224,14.402 14.326,14.3 14.724,14.3 ; U7.9 14.724,14.3 ; 14.732,14.275 14.724,14.283 14.724,14.3 ; 14.732,14.3 15.9,14.3 16.281,13.919 20.295,13.919 22.682,11.532 25.171,11.532 26.402,12.762 U2.35
SW1: L4.2 U7.2 | length 4.9
  Top Layer w0.254: U7.2 14.724,18.509 14.834,18.618
  Top Layer w0.508: 14.834,18.618 14.834,21.107 15.06,21.334 L4.2@16.358,21.334
SW2: C17.2 L5.2 U7.4 | length 5.3
  Top Layer w0.254: C17.2 11.252,20.648 L5.2@11.887,21.283 ; 13.614,18.533 13.724,18.423 U7.4
  Top Layer w0.508: L5.2@11.887,21.283 L5.2@12.012,21.158 ; 13.614,18.533 L5.2@13.614,20.93
TCK: P1.4 U2.18 | length 40.1
  Top Layer w0.305: v1(33.096,22.174) 33.408,21.862 U2.18
  Bottom Layer w0.305: P1.4 4.572,10.744 8.927,10.744 11.937,7.734 20.194,7.734 28.74,16.28 28.74,19.758 31.156,22.174 v1(33.096,22.174)
TDI: P1.2 U2.16 | length 43
  Top Layer w0.254: v1(29.159,15.088) 29.693,14.554
  Top Layer w0.305: P1.2 5.944,7.036 26.752,7.036 29.718,10.001 29.718,14.529 29.693,14.554 ; v1(31.775,20.676) 31.889,20.562 U2.16
  Bottom Layer w0.305: v1(29.159,15.088) 29.159,15.162 29.654,15.658 29.654,19.379 30.595,20.32 31.42,20.32 v1(31.775,20.676)
TDO: P1.1 U2.15 | length 43.3
  Top Layer w0.254: v1(30.023,15.164) v1@30.15,15.037
  Top Layer w0.305: P1.1 8.026,6.579 26.942,6.579 30.175,9.812 30.175,15.011 v1@30.15,15.037 ; v1(32.664,19.761) 32.816,19.912 U2.15
  Bottom Layer w0.305: v1(30.023,15.164) 30.15,15.291 30.15,19.152 30.112,19.19 30.785,19.863 v1@32.588,19.863
TEST: P1.11 U2.21 | length 40
  Top Layer w0.305: U2.21 29.192,21.862 v1(29.413,21.641)
  Bottom Layer w0.305: P1.11 2.057,10.287 3.353,11.582 8.788,11.582 12.179,8.191 20.005,8.191 28.283,16.47 28.283,20.511 v1(29.413,21.641)
TMS: P1.3 U2.17 | length 40.7
  Top Layer w0.305: v1(32.995,21.311) 33.093,21.212 U2.17
  Bottom Layer w0.305: P1.3 6.655,10.287 8.738,10.287 11.747,7.277 20.383,7.277 29.197,16.091 29.197,19.568 30.914,21.285 32.969,21.285 v1(32.995,21.311)
TX: P1.13 U2.23 | length 32.5
  Top Layer w0.305: v1(25.019,20.472) 25.146,20.599 27.226,20.599 U2.23
  Bottom Layer w0.305: P1.13 2.794,16.586 2.794,18.263 8.788,24.257 22.098,24.257 25.019,21.336 v1(25.019,20.472)
VCOM: J1.22 TP16.0 U5.1 U5.4 | length 39.9
  Top Layer w0.203: v1(41.061,18.034) 41.629,17.466 J1.22@42.618,17.466
  Top Layer w0.254: U5.4 43.171,6.403 U5.1
  Top Layer w0.305: U5.1 45.113,6.403 v1(45.568,6.858) ; v1(46.838,29.261) 47.244,29.667 TP16.0
  Bottom Layer w0.305: v1(41.061,18.034) 42.102,19.075 43.993,19.075 45.288,17.78 ; v1(45.568,6.858) 45.618,6.909 45.618,7.671 47.993,10.046 47.993,15.075 45.288,17.78 ; v1(46.838,29.261) 45.288,27.711 45.288,17.78
VIN: C2.1 P2.1 U1.1 | length 13
  Top Layer w0.635: P2.1 2.946,31.166 2.946,29.134 3.454,28.626 7.391,28.626 8.382,27.635 ; U1.1 8.382,26.588 8.382,27.635 ; C2.1 8.585,27.838 8.382,27.635
pads on no net: C2.0 C4.0 J1.21 J1.39 J1.40 J1.41 P1.10 U1.0 U1.3 U1.4 U6.3 U6.7 U8.3 U8.7

## Polygon pours and split planes (outlines as drawn)
GND on Bottom Layer "Bottom Layer-No Net" (solid, pour order 2): 0.356,33.858 0.356,0.356 49.174,0.356 49.174,33.858
GND on Top Layer "Bottom Layer-No Net" (solid, pour order 4): 0.356,33.858 49.174,33.858 49.174,0.356 0.356,0.356

## Silkscreen, mask and mechanical layers (free items; w line width, h text height)
Top Overlay:
  text "D7" at 30.277,30.988 h1.27 r90
  text "D5" at 14.63,30.963 h1.27 r90
  text "D4" at 18.542,30.937 h1.27 r90
  text "D6" at 22.428,30.937 h1.27 r90
  text "VGP" at 34.265,29.743 h1.27 r90
  text "+15V" at 10.668,29.439 h1.27 r90
  text "+22V" at 6.985,28.931 h1.27 r90
  text "GDPS" at 38.151,28.524 h1.27 r90
  text "VCOM" at 45.923,28.524 h1.27 r90
  text "GDCLK" at 42.012,27.28 h1.27 r90
  text "GMODE" at 26.34,27.229 h1.27 r90
  text "Eink V2.0 1640" at 13.665,6.401 h1.27
  text "www.CircuitValley.com" at 13.665,4.928 h1.27
  text "D1" at 10.693,1.803 h1.27 r90
  text "D3" at 14.605,1.626 h1.27 r90
  text "D2" at 18.542,1.473 h1.27 r90
  text "LE" at 22.479,1.372 h1.27 r90
  text "D0" at 34.214,1.346 h1.27 r90
  text "CL" at 42.113,1.346 h1.27 r90
  text "OE" at 45.949,1.321 h1.27 r90
  text "-20V" at 6.909,0.991 h1.27 r90
  text "SPH" at 26.391,0.889 h1.27 r90
  text "SHR" at 30.302,0.838 h1.27 r90
  text "-15V" at 38.049,0.635 h1.02 r90
Bottom Overlay:
  text "VIN" at 8.89,32.029 h1.02
  text "GND" at 12.675,31.953 h1.02
  text "SDA" at 8.915,29.54 h1.02
  text "CLK" at 12.7,29.413 h1.02
  text "SCL" at 8.865,27.102 h1.02
  text "CS" at 12.522,27.102 h1.02
  text "3.3V" at 9.322,24.435 h1.02
  text "P5" at 12.522,24.359 h1.02
Mechanical 1:
  the board outline again, w0.254
Mechanical 27:
  the board outline again, w0.1